# Altium PCB Test Board_CC1101.PcbDoc
Units mm, origin at the board's own origin, x right, y up, seen from the top; angles counter-clockwise.
Board outline 50 x 50 mm, 2 copper layers (Top Layer, Bottom Layer); 19 components, 24 nets, 82 pads, 36 vias.
Unrouted connection lines stored in the file: 1.
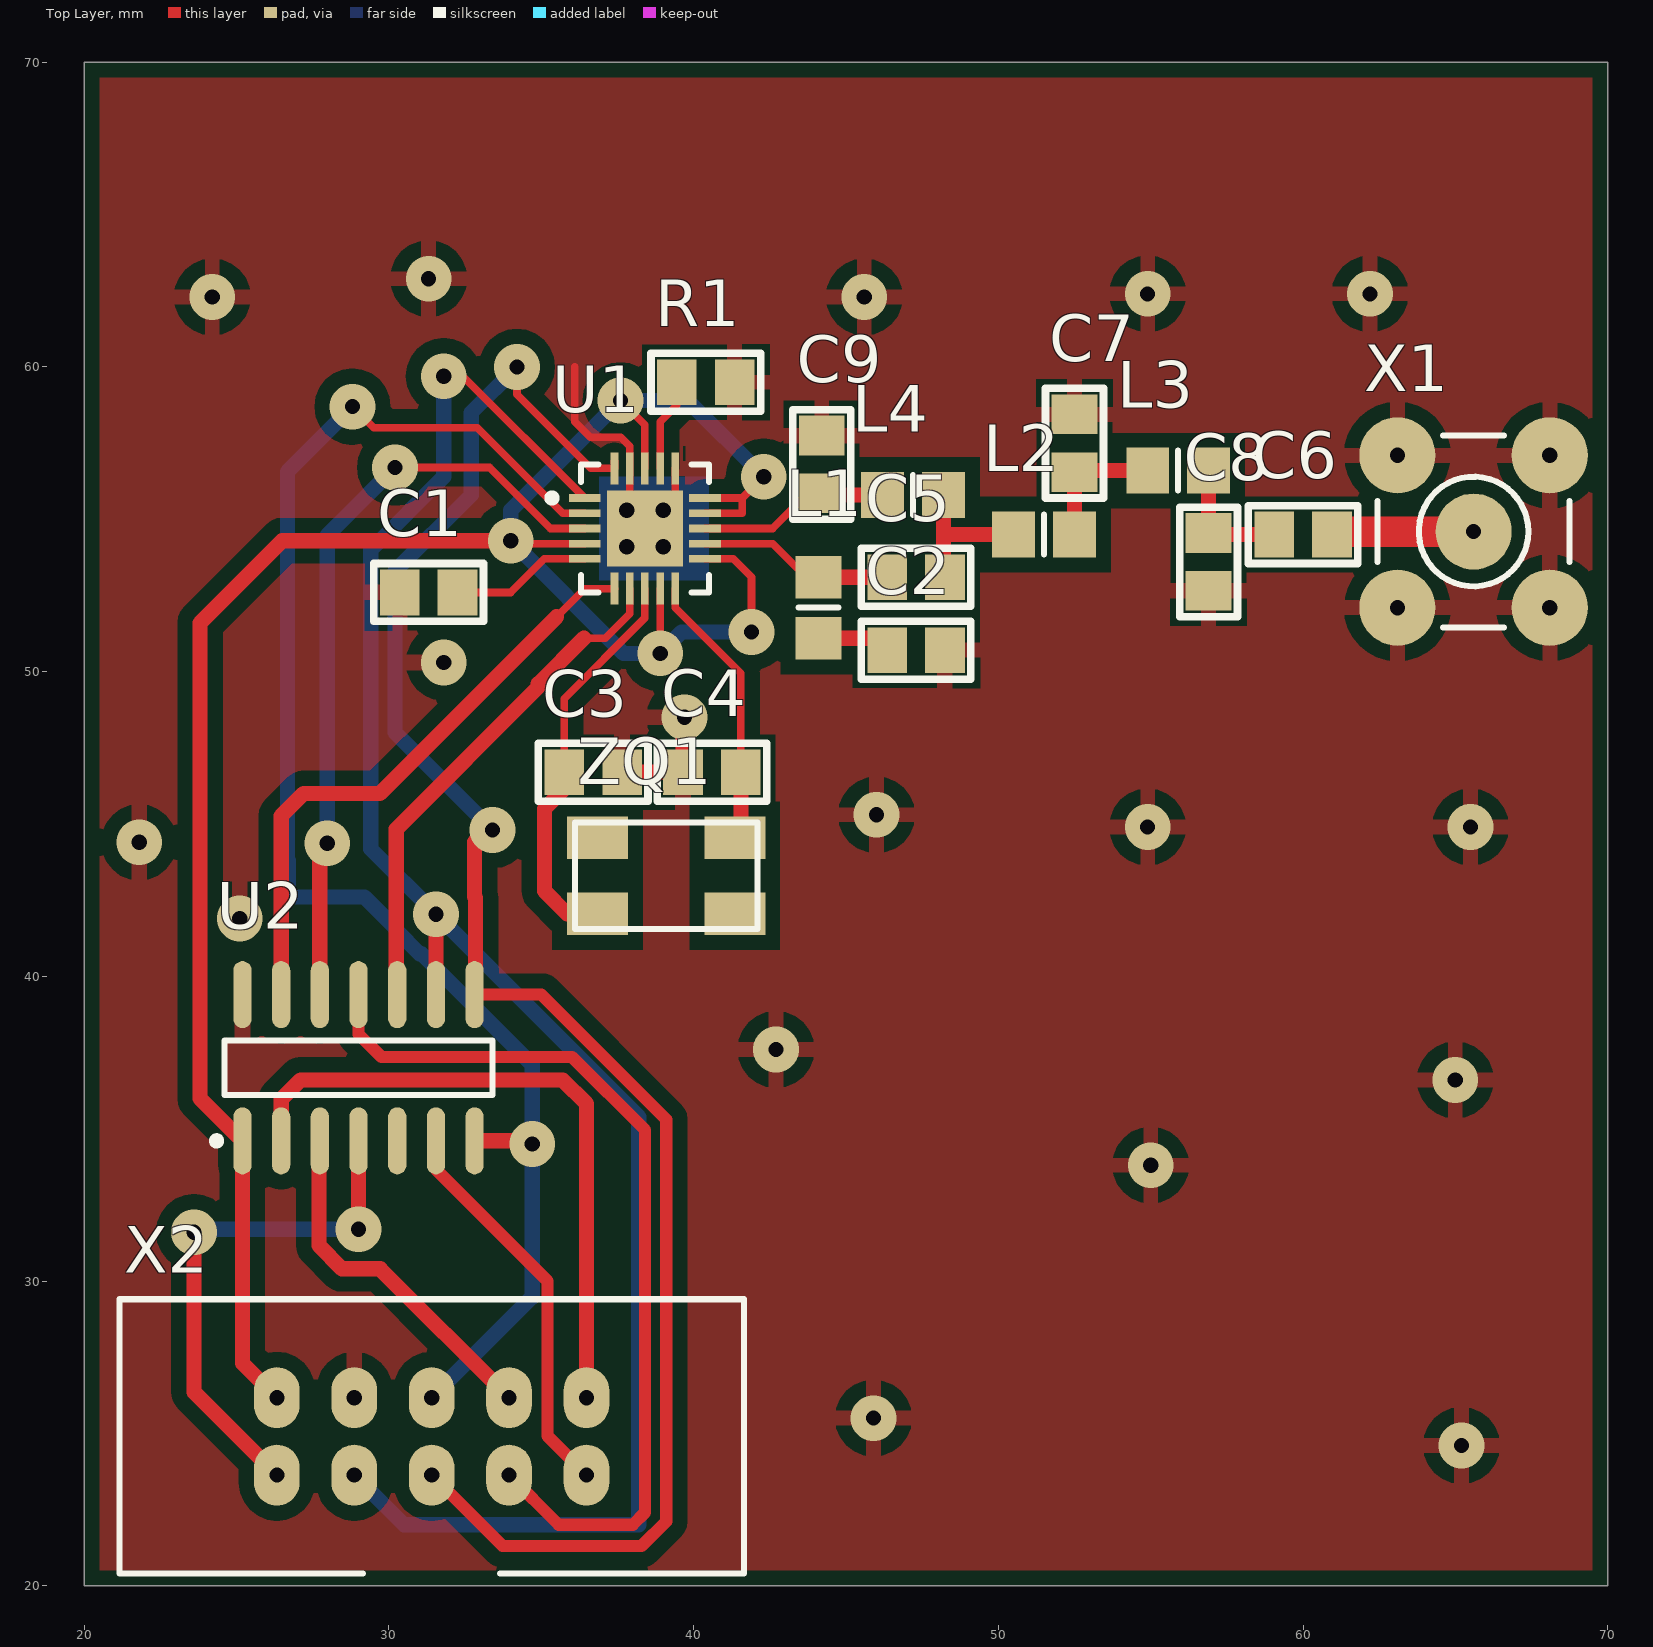
[diagram p0: Top Layer view]
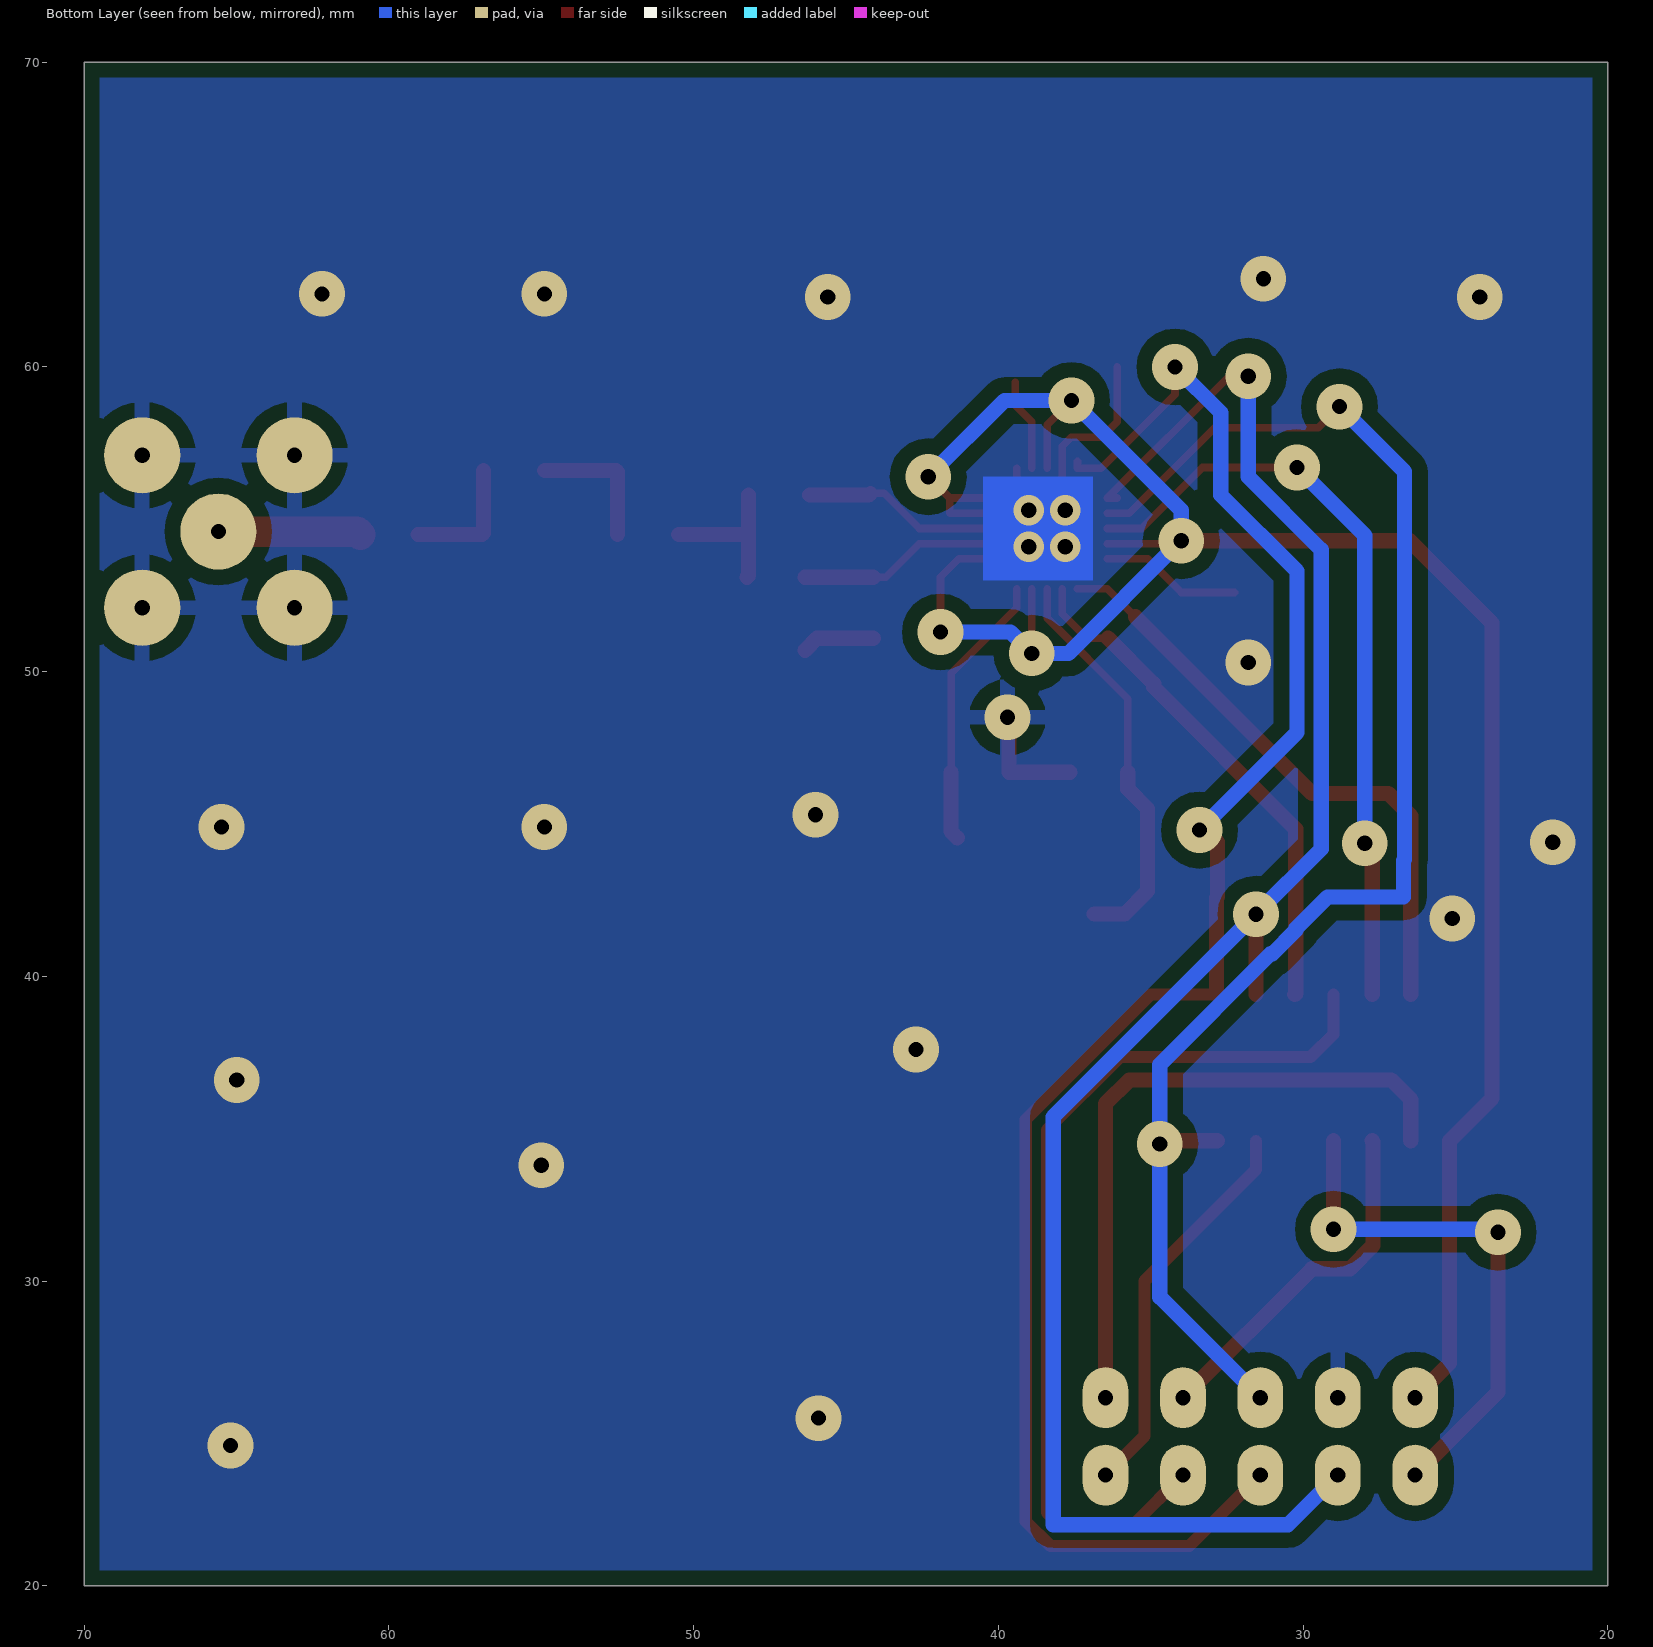
[diagram p1: Bottom Layer view, seen from below]

## Layer stack, top to bottom
Top Layer: signal copper 0.0356
Dielectric: dielectric 0.32, FR-4, Dk 4.8
Bottom Layer: signal copper 0.0356

## Board outline
20,20 20,70 70,70 70,20

## Design rules (kind name [scope] priority, off if disabled: settings)
Clearance "Clearance_GND_VCC +3.3" [InNet('GND') vs InNet('VCC +3.3')] p1 off: gap=0.2
Clearance Clearance_U3_Trace [(IsTrack  And IsNet)  And InRegion(3815,3770 ,4275 ,4280) vs (IsTrack  And IsNet)  And InRegion(3815,3770 ,4275 ,4280)] p2: gap=0.2
Clearance Clearance_QFP_NET [InNet('NetU1_20','NetU1_7','NetU1_6','NetU1_3','NetU1_2','NetU1_1','VCC','NetC3_2','SSCK','NetC5_1','NetC9_1','GND','NetC4_2','NetANT1_1','NetR1_2','NetC1_2')  And InRegion(1311,1988 ,1800 ,2464) vs InNet('NetU1_20','NetU1_7','NetU1_6','NetU1_3','NetU1_2','NetU1_1','VCC','NetC3_2','SSCK','NetC5_1','NetC9_1','GND','NetC4_2','NetANT1_1','NetR1_2')  And InRegion(1311,1988 ,1800 ,2464)] p3: gap=0.2
Clearance Clearance_QFP_Pins [InComponent('U1') And IsPad] p4: gap=0.2
Clearance Clearance_GND [InPolygon] p5: gap=0.5
Clearance [All] p6: gap=0.3
ComponentClearance ComponentClearance_R1_C10 [InComponent('C10') vs InComponent('R1')] p1 off: gap=0 collisioncheckmode=3 verticalgap=0 showdistances=FALSE
ComponentClearance [All] p2 off: gap=0.3 collisioncheckmode=3 verticalgap=0.3 showdistances=FALSE
HoleSize [All] p1: absolutevalues=TRUE maxlimit=5 minlimit=0.3 maxpercent=80.000 minpercent=20.000
MinimumSolderMaskSliver [All] p1 off: minsoldermaskwidth=0.254
NetAntennae [All] p1: netantennaetolerance=50
PlaneConnect [All] p1: planeconnectstyle=Relief reliefexpansion=0.508 reliefentries=4 reliefconductorwidth=0.3 reliefairgap=0.3
PolygonConnect [All] p1: connectstyle=Relief reliefconductorwidth=0.5 reliefentries=4 polygonreliefangle="90 Angle"
RoutingCorners [All] p1: cornerstyle=45-Degree minsetback=2.54 maxsetback=5
RoutingVias [All] p1: holewidth=0.5 width=1.6 viastyle="Through Hole" minholewidth=0.3 minwidth=1 maxholewidth=1 maxwidth=2
ShortCircuit ShortCircuit_ANT1 [InComponent('ANT1')] p1: allowed=TRUE
ShortCircuit [All] p2: allowed=FALSE
SilkToSilkClearance [All] p1 off: silktosilkclearance=0.3
SilkscreenOverComponentPads [All] p1 off: minsilkscreentomaskgap=0.254
SolderMaskExpansion [All] p1: expansion=0.102
Width [All] p1: maxlimit=5 minlimit=0.2 preferedwidth=0.3
19 further rules are at their usual default settings.

## Components (designator, comment, footprint, x,y, rotation, side; value= is the part's Value field where it differs from the comment)
C1 "KONDENS_SMD" C0805 31.3,52.6 r0 top
C2 "KONDENS_SMD" C0805 47.3,50.7 r180 top
C3 "KONDENS_SMD" C0805 36.7,46.7 r180 top
C4 "KONDENS_SMD" C0805 40.6,46.7 r0 top
C5 "KONDENS_SMD" C0805 47.3,53.1 r0 top
C6 "KONDENS_SMD" C0805 60,54.5 r0 top
C7 "KONDENS_SMD" C0805 52.5,57.5 r90 top
C8 "KONDENS_SMD" C0805 56.9,53.6 r270 top
C9 "KONDENS_SMD" C0805 44.2,56.8 r90 top
L1 "SMD_0805" 6-0805_M 44.1,52.1 r270 top
L2 "SMD_0805" 6-0805_M 51.5,54.5 r0 top
L3 "SMD_0805" 6-0805_M 55.9,56.6 r0 top
L4 "SMD_0805" 6-0805_M 47.2,55.8 r0 top
R1 "RES" C0805 40.4,59.5 r180 top
U1 "CC1101" VQFN20 38.4,54.7 r0 top
U2 "ATtiny44A-SSU" 14S1_N 29,37 r90 top
X1 "SMA" SMA 65.6,54.6 r0 top
X2 "IDC-10M" IDC-10M 31.4,24.9 r90 top
ZQ1 "SMD0603" Quartz_SMD0603 39.1,43.3 r180 top

## Footprints (in the part's own frame and the unit in brackets; to place one, negate y for a bottom-side part, rotate by r counter-clockwise, add the part's x,y. Pads: shape width x height; smd on the part's side, far side on the other; paste and mask are expansions set on the pad)
6-0805_M [mm] "Chip Resistor, Body 2.0x1.2mm, IPC Low Density"
  rect 1.4x1.5 smd: 1(-1,0) 2(1,0)
  silkscreen extent 0,-0.65 0,0.65, body extent -1.07,-0.7 1.07,0.7, height 0.7
14S1_N [mm] "SOIC, 14-Leads, Body 8.7x3.9mm, Pitch 1.27mm, IPC Medium Density"
  oval 2.2x0.6 smd: 1(-2.4,3.81) 2(-2.4,2.54) 3(-2.4,1.27) 4(-2.4,0) 5(-2.4,-1.27) 6(-2.4,-2.54) 7(-2.4,-3.81) 8(2.4,-3.81) 9(2.4,-2.54) 10(2.4,-1.27) 11(2.4,0) 12(2.4,1.27) 13(2.4,2.54) 14(2.4,3.81)
  silkscreen extent -2.52,-4.4 0.9,4.78, body extent -2,-4.38 2,4.38, height 1.75
C0805 [mm]
  rect 1.3x1.5 smd: 1(-0.95,0) 2(0.95,0)
  silkscreen extent -1.8,-0.95 1.8,0.95
IDC-10M [mm]
  oval 2x1.5 hole 0.5 unplated: 1(-1.27,5.08) 2(1.27,5.08) 3(-1.27,2.54) 4(1.27,2.54) 5(-1.27,0) 6(1.27,0) 7(-1.27,-2.54) 8(1.27,-2.54) 9(-1.27,-5.08) 10(1.27,-5.08)
  silkscreen extent -4.5,-10.25 4.5,10.25
Quartz_SMD0603 [mm]
  rect 2x1.4 smd: 1(-2.25,-1.25) 2(2.25,-1.25) 3(2.25,1.25) 4(-2.25,1.25)
  silkscreen extent -3,-1.75 3,1.75
SMA [mm]
  round 2.5 hole 0.5: 1(0,0) 2(-2.5,2.5) 3(2.5,2.5) 4(-2.5,-2.5) 5(2.5,-2.5)
  silkscreen extent -3.15,-3.15 3.15,3.15
VQFN20 [mm] "QFN, 20-Leads, Body 4,2x4,2mm (max), Pitch 0,50mm, IPC Low Density"
  rect 1.05x0.25 smd: 1(-1.975,1) 2(-1.975,0.5) 3(-1.975,0) 4(-1.975,-0.5) 5(-1.975,-1) 11(1.975,-1) 12(1.975,-0.5) 13(1.975,0) 14(1.975,0.5) 15(1.975,1)
  rect 0.25x1.05 smd: 6(-1,-1.975) 7(-0.5,-1.975) 8(0,-1.975) 9(0.5,-1.975) 10(1,-1.975) 16(1,1.975) 17(0.5,1.975) 18(0,1.975) 19(-0.5,1.975) 20(-1,1.975)
  rect 2.5x2.5 smd: 21(0,0)
  silkscreen extent -3.17,-2.1 2.1,2.1, body extent -2.07,-2.07 2.07,2.07, height 0.8

## Part data
L1 L2 L3 L4: library part Induktor_0805
R1: "Resistor"
U2: "8-bit AVR Microcontroller, 1.8-5.5V, 4KB Flash, 256 Bytes EEPROM, 256 Bytes SRAM, 14-pin SOIC, Industrial Grade (-40°C to 85°C), Pb-Free"
ZQ1: library part Quartz_SMD0603

## Via types
v1: diameter 1.5, hole 0.5, Top Layer to Bottom Layer, 32 vias
v2: diameter 1, hole 0.5, Top Layer to Bottom Layer, tented top, 4 vias

## Nets (pads, with @x,y where several pads share a name; then routed paths per layer and width w, separated by ;. In a path a pad name is that pad's centre, name@x,y a point inside that pad or via, vN(x,y) a via of type N, cw(c..) or ccw(c..) an arc to the next point about the centre after c; other vN are vias at no path point)
GND: C1.1 C2.1 C3.1 C4.1 C7.2 C8.2 C9.2 R1.1 U1.16 U1.19 U1.21 U2.14 X1.2 X1.3 X1.4 X1.5 X2.4 | length 13
  Top Layer w0.25: 36.1,60 36.1,58.2 36.6,57.7 37.6,57.7 37.9,57.4 U1.19 37.9,55.2 U1.21 39.4,55.7 U1.16
  Top Layer w0.5: C3.1 C4.1 39.65,48.45 v1(39.7,48.5)
  other v1: 65.2,24.6 45.9,25.5 55,33.8 65,36.6 42.7,37.6 25.1,41.9 21.8,44.4 54.9,44.9 65.5,44.9 46,45.3 31.8,50.3 24.2,62.3 45.6,62.3 54.9,62.4 62.2,62.4 31.3,62.9
  other v2: 37.8,54.1 39,54.1 37.8,55.3 39,55.3
NetC1_2: C1.2 U1.5 | length 4.6
  Top Layer w0.25: C1.2 34,52.6 35.1,53.7 U1.5
NetC2_2: C2.2 L1.2 | length 2.4
  Top Layer w0.5: L1.2 45.95,51.1 C2.2
NetC3_2: C3.2 U1.8 ZQ1.3 | length 13.3
  Top Layer w0.25: C3.2 35.75,49.112 38.35,51.712 ; 38.4,51.762 U1.8
  Top Layer w0.5: C3.2 35.75,46.15 35.1,45.5 35.1,42.8 35.85,42.05 ZQ1.3
NetC4_2: C4.2 U1.10 ZQ1.1 | length 9.1
  Top Layer w0.25: U1.10 39.4,52.1 41.55,49.95 C4.2
  Top Layer w0.5: ZQ1.1 41.55,44.75 C4.2
NetC5_1: C5.1 L1.1 U1.12 | length 6.4
  Top Layer w0.25: U1.12 42.6,54.2 43.7,53.1 L1.1
  Top Layer w0.5: L1.1 C5.1
NetC5_2: C5.2 L2.1 L4.2 | length 5
  Top Layer w0.5: L4.2 48.2,54.475 ; C5.2 48.2,53.15 48.2,54.475 ; L2.1 48.225,54.5 48.2,54.475
NetC6_1: C6.1 C8.1 L3.2 | length 4.2
  Top Layer w0.5: L3.2 C8.1 56.95,54.5 C6.1
NetC6_2: C6.2 X1.1 | length 4.7
  Top Layer w1: C6.2 61.05,54.6 X1.1
NetC7_1: C7.1 L2.2 L3.1 | length 4.5
  Top Layer w0.5: L2.2 C7.1 52.55,56.6 L3.1
NetC9_1: C9.1 L4.1 U1.13 | length 6.3
  Top Layer w0.25: U1.13 42.6,54.7 43.75,55.85 C9.1
  Top Layer w0.5: C9.1 44.25,55.8 L4.1
NetR1_2: R1.2 U1.17 | length 3.1
  Top Layer w0.25: U1.17 38.9,58.2 39.45,58.75 R1.2
NetU1_1: U1.1 U2.9 X2.3 | length 62
  Top Layer w0.25: v1(31.8,59.7) 32.425,59.7 U1.1 U1.1@36.1,55.7
  Top Layer w0.5: U2.9 v1(31.54,42.04)
  Bottom Layer w0.5: X2.3 30.49,22 38.2,22 38.2,35.38 v1(31.54,42.04) 29.4,44.18 29.4,54 31.8,56.4 v1(31.8,59.7) v1@31.54,59.44
NetU1_2: U1.2 U2.7 X2.6 | length 50.7
  Top Layer w0.25: v1(28.8,58.7) 29.5,58 32.9,58 35.7,55.2 U1.2
  Top Layer w0.5: U2.7 34.7,34.6 v1(34.7,34.5)
  Bottom Layer w0.5: v1(28.8,58.7) 26.67,56.57 26.67,43.832 26.7,43.802 26.7,42.6 29.2,42.6 30.24,41.56 30.24,41.502 31.002,40.74 31.06,40.74 34.7,37.1 v1(34.7,34.5) 34.7,29.47 X2.6
NetU1_3: U1.3 U2.12 | length 25.5
  Top Layer w0.25: v1(30.2,56.7) 33.3,56.7 35.3,54.7 U1.3
  Top Layer w0.5: U2.12 27.73,44.37 v1(27.97,44.37)
  Bottom Layer w0.5: v1(27.97,44.37) 27.97,54.47 v1(30.2,56.7)
NetU1_6: U1.6 U2.13 | length 19.9
  Top Layer w0.25: 35.5,51.8 36.425,52.725 U1.6
  Top Layer w0.5: U2.13 26.46,45.26 27.2,46 29.7,46 35.5,51.8
NetU1_7: U1.7 U2.10 | length 16.9
  Top Layer w0.25: 36.4,51.1 37.102,51.1 37.9,51.898 U1.7
  Top Layer w0.5: U2.10 30.24,39.43 30.24,44.84 34.9,49.5 34.9,49.6 36.4,51.1
NetU1_20: U1.20 U2.8 X2.5 | length 59.7
  Top Layer w0.25: v1@34.3,60 v1(34.2,60) 34.2,59.1 36.625,56.675 U1.20 U1.20@37.4,56.9
  Top Layer w0.4: X2.5 33.73,21.3 38.29,21.3 39.1,22.11 39.1,35.3 35,39.4 U2.8
  Top Layer w0.5: U2.8 32.84,39.43 32.84,42.578 32.81,42.608 32.81,44.41 33.3,44.9 v1(33.4,44.8)
  Bottom Layer w0.5: v1(33.4,44.8) 30.2,48 30.2,53.3 32.7,55.8 32.7,58.5 v1(34.2,60)
NetU2_2: U2.2 X2.10 | length 21.6
  Top Layer w0.5: U2.2 26.46,35.96 27.1,36.6 35.7,36.6 36.48,35.82 X2.10
NetU2_3: U2.3 X2.8 | length 11.8
  Top Layer w0.5: U2.3 27.7,34.57 27.7,31.162 28.462,30.4 29.71,30.4 X2.8
NetU2_4: U2.4 X2.1 | length 17.5
  Top Layer w0.5: v1(23.6,31.6) 23.6,26.35 X2.1 ; v1(29,31.7) U2.4
  Bottom Layer w0.5: v1(23.6,31.6) 23.6,31.7 v1(29,31.7)
NetU2_6: U2.6 X2.9 | length 13
  Top Layer w0.4: U2.6 31.54,33.66 35.2,30 35.2,24.91 X2.9
NetU2_11: U2.11 X2.7 | length 29.9
  Top Layer w0.4: U2.11 29,38.1 29.75,37.35 36.011,37.35 38.4,34.961 38.4,22.4 38,22 35.57,22 X2.7
VCC: U1.4 U1.9 U1.11 U1.14 U1.15 U1.18 U2.1 X2.2 | length 73.8
  Top Layer w0.25: v1@34.2,54.2 U1.4 ; v1(37.6,58.9) 38.4,58.1 U1.18 ; v1(38.9,50.6) U1.9 ; U1.11 41.3,53.7 41.9,53.1 v1(41.9,51.3) ; U1.14 41.6,55.2 41.6,55.7 ; U1.15 41.6,55.7 ; v1(42.3,56.4) 41.6,55.7
  Top Layer w0.5: X2.2 25.19,27.3 U2.1 23.8,35.99 23.8,51.6 26.5,54.3 v1(34,54.3)
  Bottom Layer w0.5: v1(41.9,51.3) 39.6,51.3 v1(38.9,50.6) 37.7,50.6 v1(34,54.3) 34,55.3 v1(37.6,58.9) 39.8,58.9 v1(42.3,56.4)
pads on no net: U2.5 ZQ1.2 ZQ1.4

## Polygon pours and split planes (outlines as drawn)
GND on Top Layer "TOP" (solid, remove dead copper, pour order 2): 20.5,69.5 69.5,69.5 69.5,20.5 20.5,20.5
GND on Bottom Layer "BOT" (solid, remove dead copper, pour order 4): 20.5,69.5 69.5,69.5 69.5,20.5 20.5,20.5

## Other copper
Bottom Layer:
  rectangle net GND: 36.9,53 40.5,56.4